# EAGLE board pentatonic-addonnboard (EAGLE 6.2)
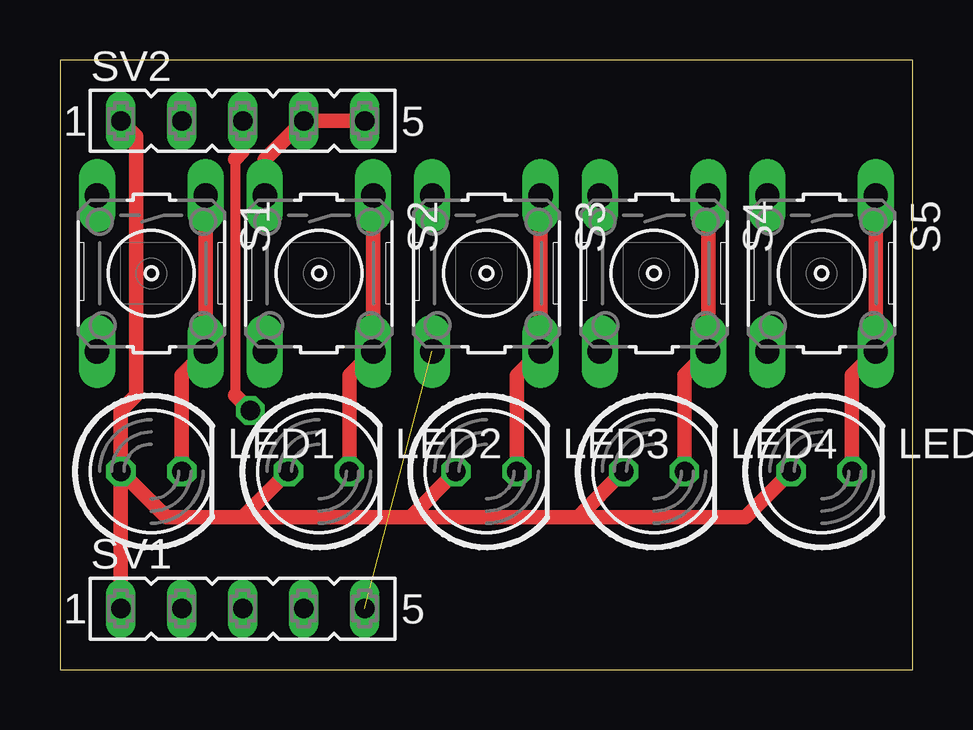
[diagram p0: board, top side]
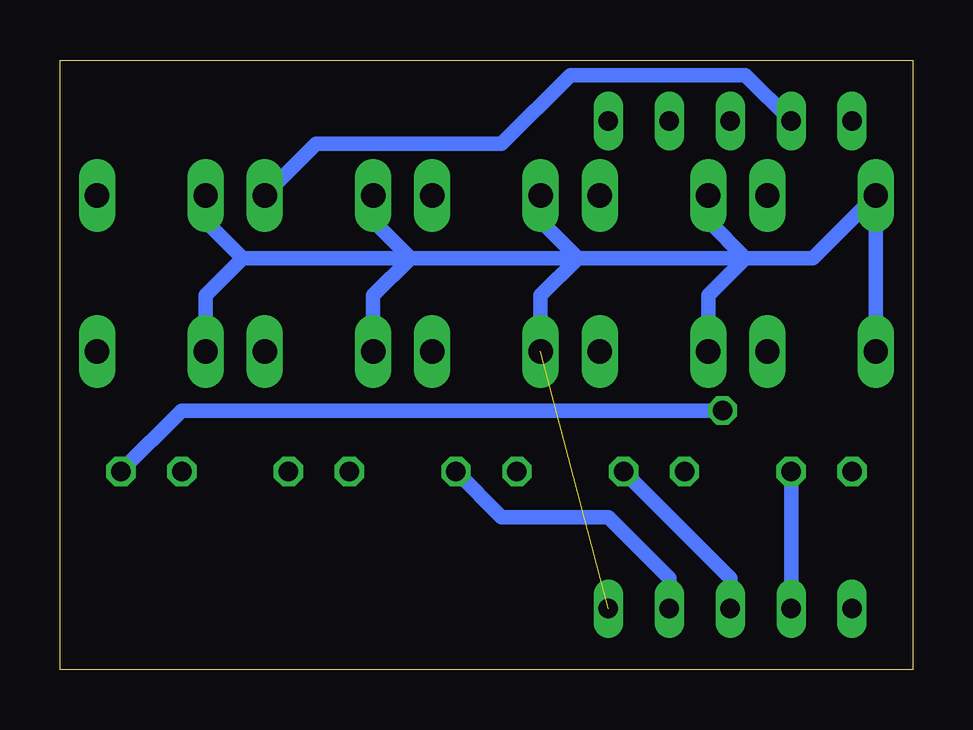
[diagram p1: board, bottom side, seen from below]

Size 35.56 x 25.4 mm. Coordinates in mm from the lower left corner, seen from the top.
Outline: 0,0 35.56,0 35.56,25.4 0,25.4 0,0
Copper layers (1*16): Top 0.0356mm / dielectric 1.5011mm / Bottom 0.0356mm
Design rules: minimum track width 6mil, minimum drill 13mil, track to track 6mil, track to pad 6mil, pad to pad 6mil, via to via 6mil, smd to smd 6mil, copper to edge 15mil, drill to drill 6mil, minimum pad ring 7mil, minimum via ring 7mil, stop-mask expansion 4mil, vias tented up to drill 0mil, thermal gap 10mil

## Footprints (pad centres in the part's own frame; a part is rotated, then mirrored left to right if it is on the bottom)
LED5MM = drill 0.813 octagon: A -1.27,0; K 1.27,0
B3F-10XX = drill 1.016 long: 1 -3.251,2.261; 2 3.251,2.261; 3 -3.251,-2.261; 4 3.251,-2.261
FE05-1 = drill 0.813 long: 1 -5.08,0; 2 -2.54,0; 3 0,0; 4 2.54,0; 5 5.08,0

## Placement (x,y rotation side)
LED1  [LED5MM]  3.81,8.26 0 top
LED2  [LED5MM]  10.79,8.26 0 top
LED3  [LED5MM]  17.78,8.26 0 top
LED4  [LED5MM]  24.77,8.26 0 top
LED5  [LED5MM]  31.75,8.26 0 top
S1  [B3F-10XX]  3.81,16.51 270 top
S2  [B3F-10XX]  10.79,16.51 270 top
S3  [B3F-10XX]  17.78,16.51 270 top
S4  [B3F-10XX]  24.77,16.51 270 top
S5  [B3F-10XX]  31.75,16.51 270 top
SV1  [FE05-1]  7.62,2.54 0 top
SV2  [FE05-1]  7.62,22.86 0 top

## Library data of the parts
LED1-LED5 = led
S1-S5 = switch-omron; MPN: B3F-1000; OC_FARNELL: 176432; OC_NEWARK: 36M3542
SV1 SV2 = con-lsta; OC_FARNELL: unknown; OC_NEWARK: unknown

## Nets
GND: S1.3 S1.4 S2.3 S2.4 S3.3 S3.4 S4.3 S4.4 S5.3 S5.4 SV1.5 SV2.4 SV2.5
PD2: LED1.K S1.1 S1.2 SV1.2
PD3: LED2.K S2.1 S2.2 SV1.3
PD4: LED3.K S3.1 S3.2 SV1.4
PD5: LED4.K S4.1 S4.2 SV2.2
PD6: LED5.K S5.1 S5.2 SV2.3
VCC: LED1.A LED2.A LED3.A LED4.A LED5.A SV1.1 SV2.1

## Tracks (layer width: path | path; a pad name or v marks a point on that pad's centre or on a via)
GND  (1 unrouted)
  Top 0.61: S2.3 8.53,21.23 SV2.4 SV2.5
  Bottom 0.61: S1.4 S1.3 4.17,17.14 6.99,17.14 | 6.99,17.14 13.97,17.14 | 13.97,17.14 20.95,17.14 | 20.95,17.14 27.94,17.14 | 27.94,17.14 29.21,18.41 29.21,19.48 S5.3 | S4.3 22.5,18.69 20.95,17.14 | S3.3 15.52,18.69 13.97,17.14 | S2.3 8.53,18.69 6.99,17.14 | S2.4 8.53,15.6 6.99,17.14 | S3.4 15.52,15.6 13.97,17.14 | S4.4 22.5,15.6 20.95,17.14 | S5.4 29.49,15.6 27.94,17.14
PD2
  Top 0.61: LED1.K 5.08,12.27 S1.2 S1.1
  Bottom 0.61: SV1.2 LED1.K
PD3
  Top 0.61: LED2.K 12.06,12.27 S2.2 S2.1
  Bottom 0.61: SV1.3 7.62,3.81 LED2.K
PD4
  Top 0.61: LED3.K 19.05,12.27 S3.2 S3.1
  Bottom 0.61: SV1.4 10.16,3.81 12.7,6.35 17.14,6.35 LED3.K
PD5
  Top 0.61: LED4.K 26.04,12.27 S4.2 S4.1
  Bottom 0.61: SV2.2 6.99,24.77 14.29,24.77 17.14,21.91 24.88,21.91 S4.1
PD6  (via drill 0.8)
  Top 0.406: 7.3,21.27 7.3,11.43
  Top 0.61: LED5.K 33.02,12.27 S5.2 S5.1 | SV2.3 7.62,21.59 7.3,21.27 | 7.3,11.43 v7.94,10.79
  Bottom 0.61: v7.94,10.79 30.48,10.79 LED5.K
VCC
  Top 0.61: SV1.1 LED1.A | LED1.A 2.54,10.79 3.17,11.43 3.17,22.23 SV2.1 | LED1.A 4.45,6.35 7.62,6.35 | 7.62,6.35 14.61,6.35 | 14.61,6.35 20.95,6.35 21.59,6.35 | 21.59,6.35 28.57,6.35 LED5.A | LED2.A 7.62,6.35 | LED3.A 14.61,6.35 | LED4.A 21.59,6.35